# Altium PCB ESP32_PCB.PcbDoc (part 1 of 2)
Units mm, origin at the board's own origin, x right, y up, seen from the top; angles counter-clockwise.
Board outline 63.5 x 20.32 mm, 4 copper layers (Top Layer, Layer 1, Layer 2, Bottom Layer), stack 0.603 mm thick; 45 components, 48 nets, 214 pads, 74 vias.
Unrouted connection lines stored in the file: 1.
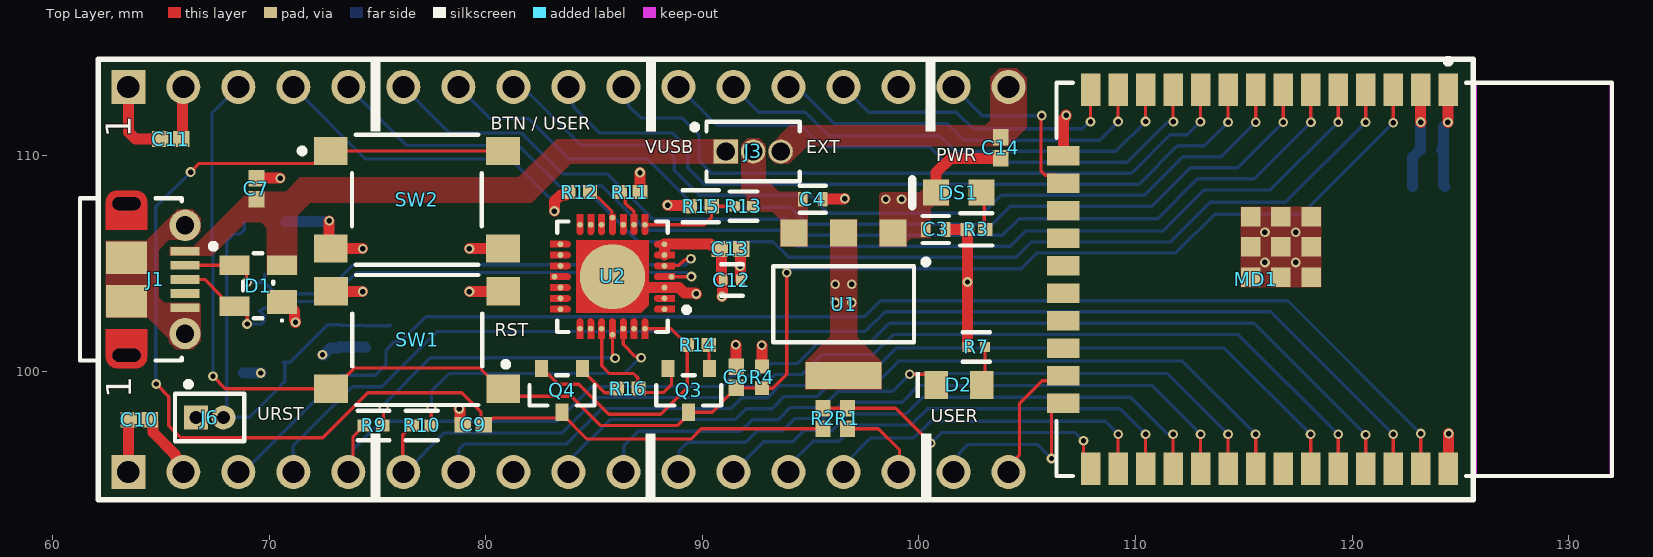
[diagram p0: Top Layer view]
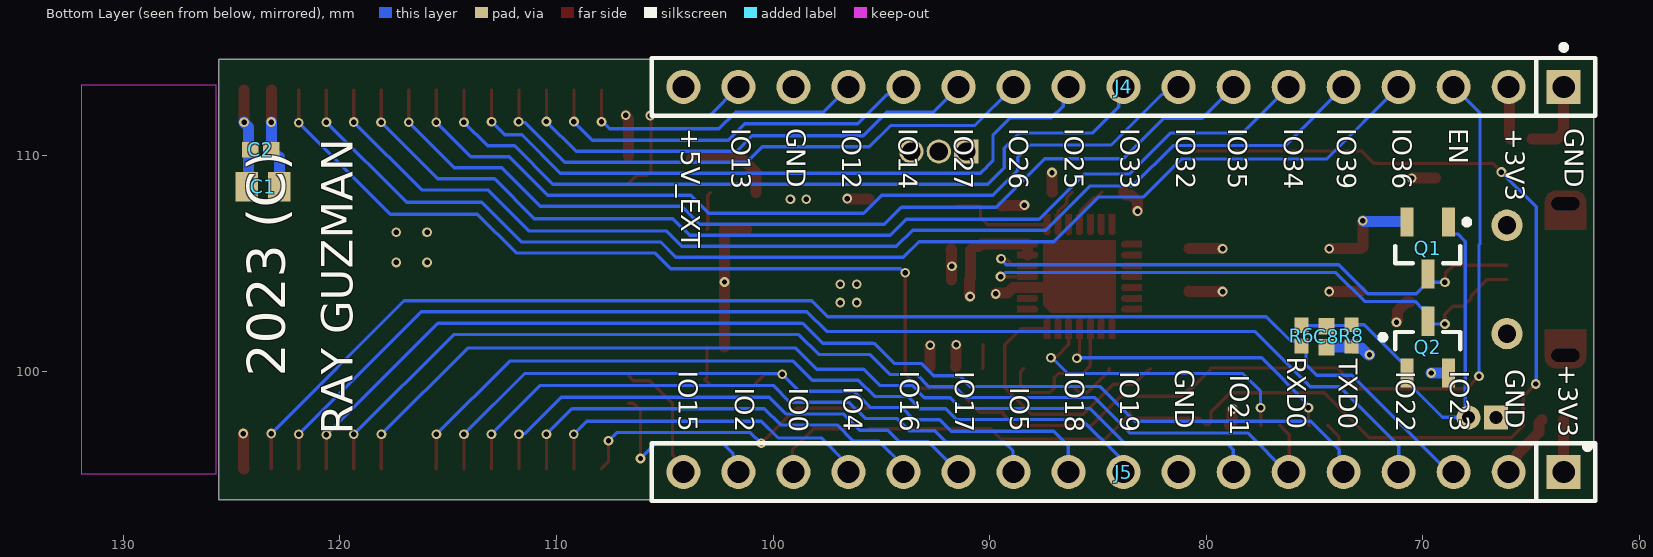
[diagram p1: Bottom Layer view, seen from below]
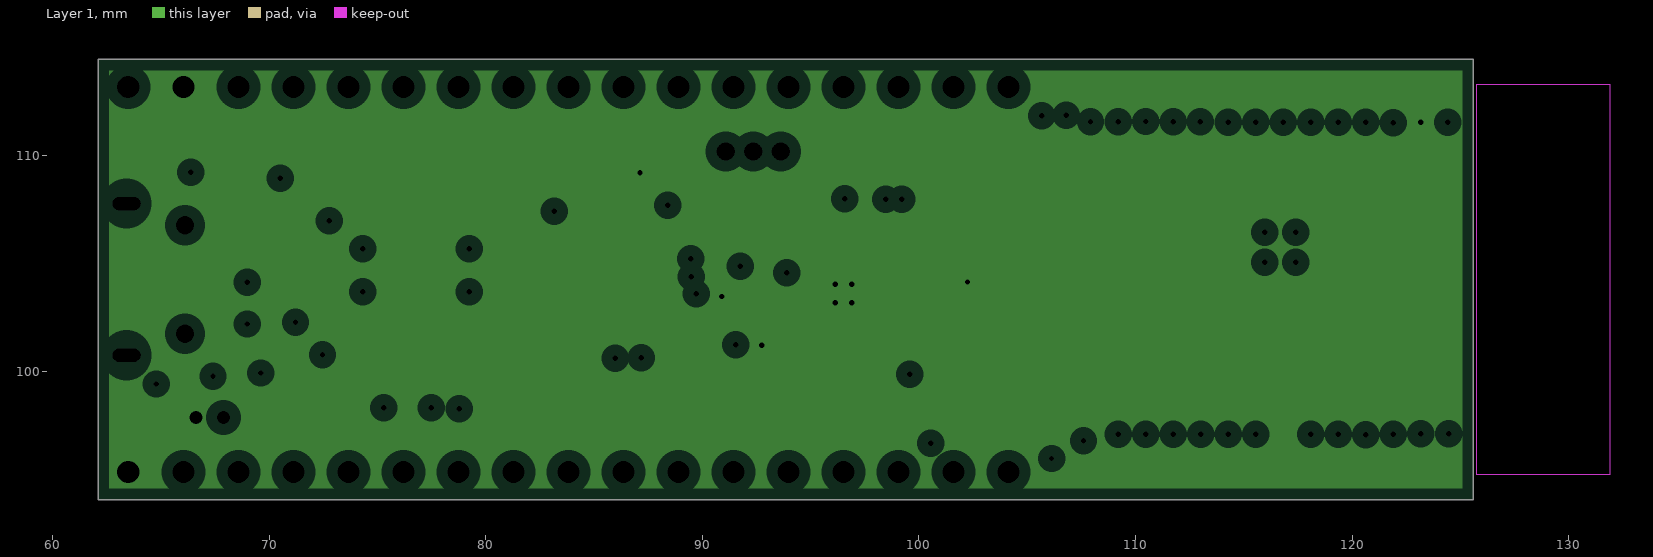
[diagram p2: Layer 1, clearances drawn from the general rule]
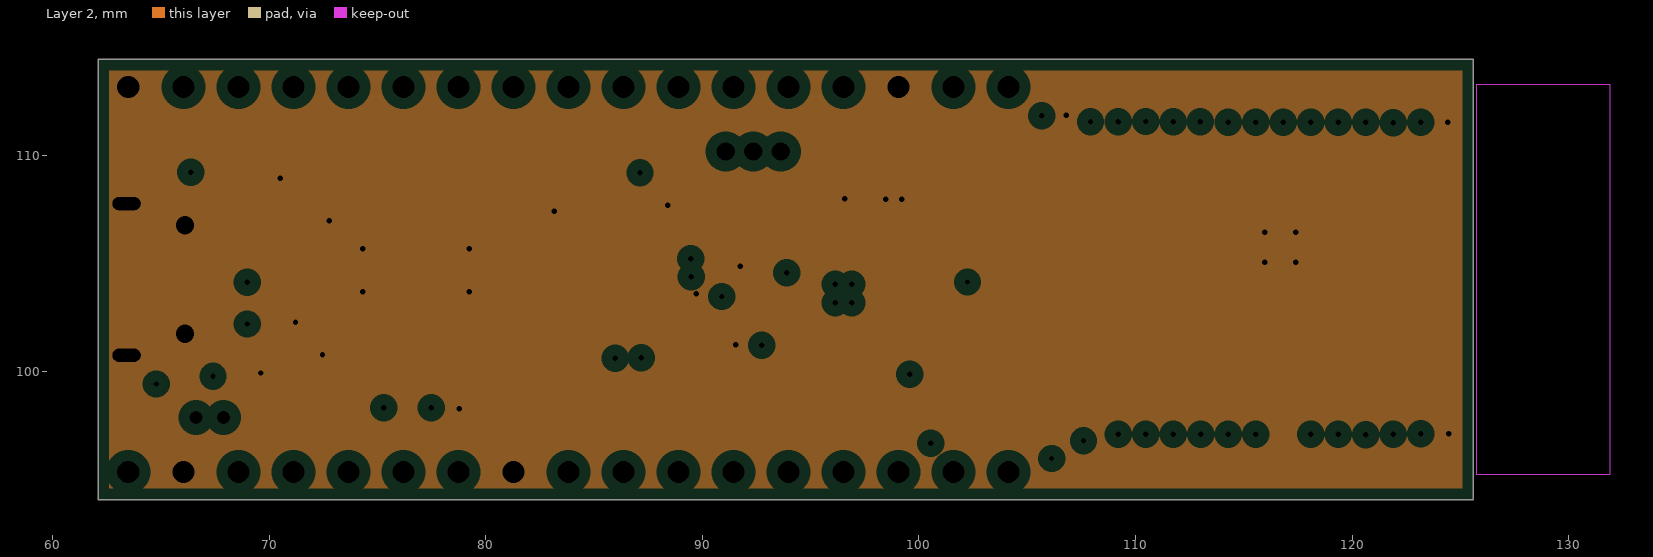
[diagram p3: Layer 2, clearances drawn from the general rule]
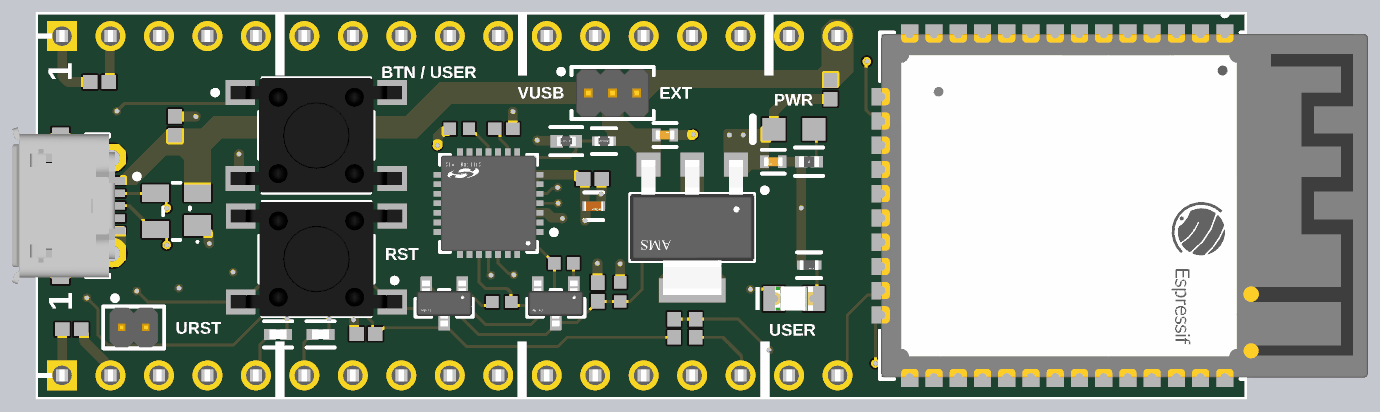
[diagram p4: 3D render of the assembled board from above, using the file's embedded part models]

## Layer stack, top to bottom
Top Solder: solder mask 0.0102, Solder Resist, Dk 3.5
Top Layer: signal copper 0.0356
Dielectric 2: prepreg 0.0711, PP-006, Dk 4.1
Layer 1: plane copper 0.035, net +3V3
Dielectric 1: dielectric 0.32, FR-4, Dk 4.8
Layer 2: plane copper 0.035, net GND
Dielectric 3: prepreg 0.0711, PP-006, Dk 4.1
Bottom Layer: signal copper 0.0356
Bottom Solder: solder mask 0.0102, Solder Resist, Dk 3.5

## Board outline
62.103,94.107 62.103,114.427 125.603,114.427 125.603,94.107

## Design rules (kind name [scope] priority, off if disabled: settings)
Clearance [IsComponent('J3')] p1: gap=0.254 ignorepadtopadclearanceinfootprint=FALSE except(0: Arc-Hole Track-Hole SMDPad-Hole THPad-Hole Via-Hole Fill-Hole Poly-Hole Region-Hole Text-Hole; 0.1: SMDPad-SMDPad; 0.2: Arc-SMDPad Track-SMDPad)
DiffPairsRouting [All] p1: maxlimit=0.203 minlimit=0.203 mostfreqgap=0.203 toplayer_minwidth=0.125 toplayer_maxwidth=0.5 toplayer_prefwidth=0.153 bottomlayer_minwidth=0.125 bottomlayer_maxwidth=0.5 bottomlayer_prefwidth=0.153 maxuncoupledlength=12.7
MinimumSolderMaskSliver [All] p1: minsoldermaskwidth=0.016
PlaneClearance [All] p1: clearance=0.508
PlaneConnect [All] p1: planeconnectstyle=Direct reliefexpansion=0.508 reliefentries=4 reliefconductorwidth=0.254 reliefairgap=0.254
PolygonConnect [All] p1: connectstyle=Direct reliefconductorwidth=0.254 reliefentries=4 polygonreliefangle="90 Angle" airgapwidth=0.254
RoutingVias [All] p1: holewidth=0.45 width=0.25 viastyle="Through Hole" minholewidth=0.45 minwidth=0.2 maxholewidth=0.8 maxwidth=0.45
SilkToSolderMaskClearance [IsPad] p1: minsilkscreentomaskgap=0.1 clearancetoexposedcopper=TRUE
SolderMaskExpansion [All] p1: expansion=0.102 istentingtop=FALSE
Width [All] p1: maxlimit=1 minlimit=0.152 preferedwidth=0.254
25 further rules are at their usual default settings.

## Classes and differential pairs
differential pair class USB_D: USB_D
differential pair USB_D: +USB_D_P -USB_D_N

## Components (designator, comment, footprint, x,y, rotation, side; value= is the part's Value field where it differs from the comment)
C1 "CL21A226MAQNNNE" CAPC2013X140X45LL15T25 123.55,108.55 r0 bottom
C2 "CL05B104KO5NNNC" CAPC1050X55X23ML05T13 123.65,110.25 r0 bottom
C3 "CL05A106MP5NUNC" FP-CL05A106MP5NUNC-MFG 100.775,106.575 r180 top value=10uF
C4 "CL05A106MP5NUNC" FP-CL05A106MP5NUNC-MFG 95.1,107.975 r0 top value=10uF
C6 "CL05B104KO5NNNC" CAPC1050X55X23ML05T13 91.575,99.75 r270 top
C7 "CL05B104KO5NNNC" CAPC1050X55X23ML05T13 69.418,108.458 r90 top
C8 "CL05B104KO5NNNC" CAPC1050X55X23ML05T13 74.45,101.625 r90 bottom
C9 "CL05B104KO5NNNC" CAPC1050X55X23ML05T13 79.423,97.55 r0 top
C10 "CL05B104KO5NNNC" CAPC1050X55X23ML05T13 64.008,97.79 r0 top
C11 "CL05B104KO5NNNC" CAPC1050X55X23ML05T13 65.465,110.75 r180 top
C12 "C1005X5R1A475K050BC" FP-C1005-050-0_15-MFG 91.364,104.242 r0 top
C13 "CL05B104KO5NNNC" CAPC1050X55X23ML05T13 91.3,105.675 r0 top
C14 "CL05B104KO5NNNC" CAPC1050X55X23ML05T13 103.775,110.35 r270 top
D1 "SP0503BAHTG" LFUS-SOT143-4_V 69.5,103.975 r180 top
D2 "150080RS75000" WL-SMCW_0805_150080xx75000 101.85,99.4 r0 top
DS1 "HSMG-C170" AVAG-HSMX-C170_V 101.85,108.275 r180 top
J1 "105017-0001" USB-MICRO-B_V 64.77,104.267 r270 top
J3 "M52-040023V0345" FP-M52-040023V0345-MFG 92.35,110.175 r0 top
J4 "TSW-117-23-T-S" FP-TSW-117-23-T-S-MFG 83.82,113.157 r0 bottom
J5 "TSW-117-23-T-S" FP-TSW-117-23-T-S-MFG 83.82,95.377 r0 bottom
J6 "Comment" FP-M50-3530242-MFG 67.259,97.892 r0 top
MD1 "ESP32-WROOM-32D (8MB)" FP-ESP32-WROOM-32D_8MB-MFG 119.176,104.267 r270 top
Q1 "2N7002" INF-PG-SOT23_M 69.774,105.715 r270 bottom
Q2 "2N7002" INF-PG-SOT23_M 69.774,101.143 r90 bottom
Q3 "SS8050-G" FP-SS8050-G-MFG 89.375,99.15 r270 top
Q4 "SS8050-G" FP-SS8050-G-MFG 83.525,99.15 r270 top
R1 "RK73B1ETTP220J" RESC1005X40X25ML10T10 96.7,97.85 r270 top
R2 "RK73B1ETTP220J" RESC1005X40X25ML10T10 95.575,97.85 r270 top
R3 "PNM0402E5001BST1" FP-PNM0402-IPC_C 102.65,106.575 r180 top
R4 "CRCW040210K0JNTD" RESC1005X40X25ML05T05 92.75,99.75 r90 top
R6 "MCMR04X1001FTL" RESC1005X40X25ML05T10 75.6,101.675 r270 bottom
R7 "ESR01MZPJ561" FP-ESR01-IPC_C 102.65,101.15 r180 top
R8 "CRCW040210K0JNTD" RESC1005X40X25ML05T05 73.3,101.675 r90 bottom
R9 "CR0402-J/-000GLF" FP-CR0402-IPC_B 74.825,97.525 r0 top
R10 "CR0402-J/-000GLF" FP-CR0402-IPC_B 77.05,97.525 r0 top
R11 "MCMR04X1001FTL" RESC1005X40X25ML05T10 86.65,108.3 r0 top
R12 "CRCW040210K0JNTD" RESC1005X40X25ML05T05 84.325,108.3 r0 top
R13 "ERJ-2RKF2212X" FP-ERJ2RK-IPC_C 91.9,107.65 r0 top
R14 "CRCW040210K0JNTD" RESC1005X40X25ML05T05 89.8,101.25 r180 top
R15 "ERJ-2RKF4752X" FP-ERJ2RK-IPC_A 89.925,107.65 r0 top
R16 "CRCW040210K0JNTD" RESC1005X40X25ML05T05 86.55,99.225 r180 top
SW1 "PTS645SH50SMTR92LFS" FP-PTS645SH50SMTR92LFS-MFG 76.835,101.473 r180 top
SW2 "PTS645SH50SMTR92LFS" FP-PTS645SH50SMTR92LFS-MFG 76.825,107.95 r0 top
U1 "AMS1117-3.3" FP-AMS1117-IPC_C 96.525,103.125 r270 top locked
U2 "CP2102N-A02-GQFN28R" FP-CP2102N-A02-GQFN28R-MFG 85.852,104.394 r180 top

## Footprints (in the part's own frame and the unit in brackets; to place one, negate y for a bottom-side part, rotate by r counter-clockwise, add the part's x,y. Pads: shape width x height; smd on the part's side, far side on the other; paste and mask are expansions set on the pad)
AVAG-HSMX-C170_V [mm] "SMD, 2-Leads, Body 2x1.25mm, Height 0.8mm"
  rect 1.2x1.2 smd: 1(-1.05,0) 2(1.05,0)
  silkscreen extent 2.15,-0.63 2.15,0.63, body extent -1,-0.63 1,0.63, height 0.8
CAPC1050X55X23ML05T13 [mm] "Chip Capacitor, 2-Leads, Body 1.05x0.55mm, IPC Low Density"
  rect 0.76x0.72 smd: 1(-0.49,0) 2(0.49,0)
  body extent -0.53,-0.28 0.53,0.27, height 0.55
CAPC2013X140X45LL15T25 [mm] "Chip Capacitor, 2-Leads, Body 2.00x1.25mm, IPC High Density"
  rect 1.05x1.35 smd: 1(-0.75,0) 2(0.75,0)
  body extent -1.08,-0.7 1.07,0.7, height 1.4
FP-AMS1117-IPC_C [mm]
  rect 1.25x1.25 smd paste+0 mask+0: 1(-3.295,2.29) 2(-3.295,0) 3(-3.295,-2.29)
  rect 1.25x3.5 smd paste+0 mask+0: 4(3.295,0)
  silkscreen extent -2.07,-3.25 1.75,3.92, body extent -3.9,-3.35 3.9,3.35, height 0.25
FP-C1005-050-0_15-MFG [mm]
  rect 0.4x0.5 smd paste+0 mask+0: 1(-0.4,0) 2(0.4,0)
  silkscreen extent -0.5,-0.73 0.5,0.73, body extent -0.7,-0.43 0.7,0.43, height 0.25
FP-CL05A106MP5NUNC-MFG [mm]
  rect 0.45x0.675 smd paste+0 mask+0: 1(-0.463,0) 2(0.463,0)
  silkscreen extent -0.6,-0.63 0.6,0.63, body extent -0.79,-0.45 0.79,0.45, height 0.25
FP-CP2102N-A02-GQFN28R-MFG [mm]
  round 0.27 smd paste+0 mask+0: 1(-2.4,1.5) 2(-2.4,1) 3(-2.4,0.5) 4(-2.725,0) 5(-2.4,-0.5) 6(-2.4,-1) 7(-2.4,-1.5) 8(-1.5,-2.4) 9(-1,-2.4) 10(-0.5,-2.4) 11(0,-2.725) 12(0.5,-2.4) 13(1,-2.4) 14(1.5,-2.4) 15(2.4,-1.5) 16(2.4,-1) 17(2.4,-0.5) 18(2.675,0) 19(2.4,0.5) 20(2.4,1) 21(2.4,1.5) 22(1.5,2.4) 23(1,2.4) 24(0.5,2.4) 25(0,2.675) 26(-0.5,2.4) 27(-1,2.4) 28(-1.5,2.4)
  round 3.015 smd paste-1000 mask+0: 29(0,0)
  Top Layer region: -2.875,1.65 -2.075,1.65 -2.018,1.639 -1.969,1.606 -1.936,1.557 -1.925,1.5 -1.925,1.5 -1.936,1.443 -1.969,1.394 -2.018,1.361 -2.075,1.35 -2.075,1.35 -2.875,1.35
  Top Layer region: -2.875,1.15 -2.075,1.15 -2.018,1.139 -1.969,1.106 -1.936,1.057 -1.925,1 -1.925,1 -1.936,0.943 -1.969,0.894 -2.018,0.861 -2.075,0.85 -2.075,0.85 -2.875,0.85
  Top Layer region: -2.875,0.65 -2.075,0.65 -2.018,0.639 -1.969,0.606 -1.936,0.557 -1.925,0.5 -1.925,0.5 -1.936,0.443 -1.969,0.394 -2.018,0.361 -2.075,0.35 -2.075,0.35 -2.875,0.35
  Top Layer region: -2.875,0.15 -2.075,0.15 -2.018,0.139 -1.969,0.106 -1.936,0.057 -1.925,0 -1.925,0 -1.936,-0.057 -1.969,-0.106 -2.018,-0.139 -2.075,-0.15 -2.075,-0.15 -2.875,-0.15
  Top Layer region: -2.875,-0.35 -2.075,-0.35 -2.018,-0.361 -1.969,-0.394 -1.936,-0.443 -1.925,-0.5 -1.925,-0.5 -1.936,-0.557 -1.969,-0.606 -2.018,-0.639 -2.075,-0.65 -2.075,-0.65 -2.875,-0.65
  Top Layer region: -2.875,-0.85 -2.075,-0.85 -2.018,-0.861 -1.969,-0.894 -1.936,-0.943 -1.925,-1 -1.925,-1 -1.936,-1.057 -1.969,-1.106 -2.018,-1.139 -2.075,-1.15 -2.075,-1.15 -2.875,-1.15
  Top Layer region: -2.875,-1.35 -2.075,-1.35 -2.018,-1.361 -1.969,-1.394 -1.936,-1.443 -1.925,-1.5 -1.925,-1.5 -1.936,-1.557 -1.969,-1.606 -2.018,-1.639 -2.075,-1.65 -2.075,-1.65 -2.875,-1.65
  Top Layer region: -1.65,-2.875 -1.65,-2.075 -1.639,-2.018 -1.606,-1.969 -1.557,-1.936 -1.5,-1.925 -1.5,-1.925 -1.443,-1.936 -1.394,-1.969 -1.361,-2.018 -1.35,-2.075 -1.35,-2.075 -1.35,-2.875
  Top Layer region: -1.15,-2.875 -1.15,-2.075 -1.139,-2.018 -1.106,-1.969 -1.057,-1.936 -1,-1.925 -1,-1.925 -0.943,-1.936 -0.894,-1.969 -0.861,-2.018 -0.85,-2.075 -0.85,-2.075 -0.85,-2.875
  Top Layer region: -0.65,-2.875 -0.65,-2.075 -0.639,-2.018 -0.606,-1.969 -0.557,-1.936 -0.5,-1.925 -0.5,-1.925 -0.443,-1.936 -0.394,-1.969 -0.361,-2.018 -0.35,-2.075 -0.35,-2.075 -0.35,-2.875
  Top Layer region: -0.15,-2.875 -0.15,-2.075 -0.139,-2.018 -0.106,-1.969 -0.057,-1.936 0,-1.925 0,-1.925 0.057,-1.936 0.106,-1.969 0.139,-2.018 0.15,-2.075 0.15,-2.075 0.15,-2.875
  Top Layer region: 0.35,-2.875 0.35,-2.075 0.361,-2.018 0.394,-1.969 0.443,-1.936 0.5,-1.925 0.5,-1.925 0.557,-1.936 0.606,-1.969 0.639,-2.018 0.65,-2.075 0.65,-2.075 0.65,-2.875
  Top Layer region: 0.85,-2.875 0.85,-2.075 0.861,-2.018 0.894,-1.969 0.943,-1.936 1,-1.925 1,-1.925 1.057,-1.936 1.106,-1.969 1.139,-2.018 1.15,-2.075 1.15,-2.075 1.15,-2.875
  Top Layer region: 1.35,-2.875 1.35,-2.075 1.361,-2.018 1.394,-1.969 1.443,-1.936 1.5,-1.925 1.5,-1.925 1.557,-1.936 1.606,-1.969 1.639,-2.018 1.65,-2.075 1.65,-2.075 1.65,-2.875
  Top Layer region: 2.875,-1.65 2.075,-1.65 2.018,-1.639 1.969,-1.606 1.936,-1.557 1.925,-1.5 1.925,-1.5 1.936,-1.443 1.969,-1.394 2.018,-1.361 2.075,-1.35 2.075,-1.35 2.875,-1.35
  Top Layer region: 2.875,-1.15 2.075,-1.15 2.018,-1.139 1.969,-1.106 1.936,-1.057 1.925,-1 1.925,-1 1.936,-0.943 1.969,-0.894 2.018,-0.861 2.075,-0.85 2.075,-0.85 2.875,-0.85
  Top Layer region: 2.875,-0.65 2.075,-0.65 2.018,-0.639 1.969,-0.606 1.936,-0.557 1.925,-0.5 1.925,-0.5 1.936,-0.443 1.969,-0.394 2.018,-0.361 2.075,-0.35 2.075,-0.35 2.875,-0.35
  Top Layer region: 2.875,-0.15 2.075,-0.15 2.018,-0.139 1.969,-0.106 1.936,-0.057 1.925,0 1.925,0 1.936,0.057 1.969,0.106 2.018,0.139 2.075,0.15 2.075,0.15 2.875,0.15
  Top Layer region: 2.875,0.35 2.075,0.35 2.018,0.361 1.969,0.394 1.936,0.443 1.925,0.5 1.925,0.5 1.936,0.557 1.969,0.606 2.018,0.639 2.075,0.65 2.075,0.65 2.875,0.65
  Top Layer region: 2.875,0.85 2.075,0.85 2.018,0.861 1.969,0.894 1.936,0.943 1.925,1 1.925,1 1.936,1.057 1.969,1.106 2.018,1.139 2.075,1.15 2.075,1.15 2.875,1.15
  Top Layer region: 2.875,1.35 2.075,1.35 2.018,1.361 1.969,1.394 1.936,1.443 1.925,1.5 1.925,1.5 1.936,1.557 1.969,1.606 2.018,1.639 2.075,1.65 2.075,1.65 2.875,1.65
  Top Layer region: 1.65,2.875 1.65,2.075 1.639,2.018 1.606,1.969 1.557,1.936 1.5,1.925 1.5,1.925 1.443,1.936 1.394,1.969 1.361,2.018 1.35,2.075 1.35,2.075 1.35,2.875
  Top Layer region: 1.15,2.875 1.15,2.075 1.139,2.018 1.106,1.969 1.057,1.936 1,1.925 1,1.925 0.943,1.936 0.894,1.969 0.861,2.018 0.85,2.075 0.85,2.075 0.85,2.875
  Top Layer region: 0.65,2.875 0.65,2.075 0.639,2.018 0.606,1.969 0.557,1.936 0.5,1.925 0.5,1.925 0.443,1.936 0.394,1.969 0.361,2.018 0.35,2.075 0.35,2.075 0.35,2.875
  Top Layer region: 0.15,2.875 0.15,2.075 0.139,2.018 0.106,1.969 0.057,1.936 0,1.925 0,1.925 -0.057,1.936 -0.106,1.969 -0.139,2.018 -0.15,2.075 -0.15,2.075 -0.15,2.875
  Top Layer region: -0.35,2.875 -0.35,2.075 -0.361,2.018 -0.394,1.969 -0.443,1.936 -0.5,1.925 -0.5,1.925 -0.557,1.936 -0.606,1.969 -0.639,2.018 -0.65,2.075 -0.65,2.075 -0.65,2.875
  Top Layer region: -0.85,2.875 -0.85,2.075 -0.861,2.018 -0.894,1.969 -0.943,1.936 -1,1.925 -1,1.925 -1.057,1.936 -1.106,1.969 -1.139,2.018 -1.15,2.075 -1.15,2.075 -1.15,2.875
  Top Layer region: -1.35,2.875 -1.35,2.075 -1.361,2.018 -1.394,1.969 -1.443,1.936 -1.5,1.925 -1.5,1.925 -1.557,1.936 -1.606,1.969 -1.639,2.018 -1.65,2.075 -1.65,2.075 -1.65,2.875
  Top Layer region: -1.325,1.675 1.675,1.675 1.675,-1.675 -1.675,-1.675 -1.675,1.325 -1.325,1.675
  silkscreen extent -3.55,-2.55 2.55,2.55, body extent -2.98,-2.98 2.98,2.98, height 0.25
FP-CR0402-IPC_B [mm]
  rect 0.615x0.572 smd paste+0 mask+0: 1(-0.429,0) 2(0.429,0)
  silkscreen extent -0.74,-0.69 0.74,0.69, body extent -0.89,-0.44 0.89,0.44, height 0.25
FP-ERJ2RK-IPC_A [mm]
  rect 0.668x0.672 smd paste+0 mask+0: 1(-0.502,0) 2(0.502,0)
  silkscreen extent -0.84,-0.74 0.84,0.74, body extent -1.04,-0.54 1.04,0.54, height 0.25
FP-ERJ2RK-IPC_C [mm]
  rect 0.468x0.472 smd paste+0 mask+0: 1(-0.402,0) 2(0.402,0)
  silkscreen extent -0.64,-0.67 0.64,0.68, body extent -0.74,-0.38 0.74,0.38, height 0.25
FP-ESP32-WROOM-32D_8MB-MFG [mm]
  rect 1.5x0.9 smd paste+0 mask+0: 1(-8.75,5.26) 2(-8.75,3.99) 3(-8.75,2.72) 4(-8.75,1.45) 5(-8.75,0.18) 6(-8.75,-1.09) 7(-8.75,-2.36) 8(-8.75,-3.63) 9(-8.75,-4.9) 10(-8.75,-6.17) 11(-8.75,-7.44) 12(-8.75,-8.71) 13(-8.75,-9.98) 14(-8.75,-11.25) 25(8.75,-11.25) 26(8.75,-9.98) 27(8.75,-8.71) 28(8.75,-7.44) 29(8.75,-6.17) 30(8.75,-4.9) 31(8.75,-3.63) 32(8.75,-2.36) 33(8.75,-1.09) 34(8.75,0.18) 35(8.75,1.45) 36(8.75,2.72) 37(8.75,3.99) 38(8.75,5.26)
  rect 0.9x1.5 smd paste+0 mask+0: 15(-5.71,-12.5) 16(-4.44,-12.5) 17(-3.17,-12.5) 18(-1.9,-12.5) 19(-0.63,-12.5) 20(0.64,-12.5) 21(1.91,-12.5) 22(3.18,-12.5) 23(4.45,-12.5) 24(5.72,-12.5)
  rect 0.9x0.9 smd paste+0 mask+0: 39(-2.9,-2.46) 39(-2.9,-1.06) 39(-2.9,-3.86) 39(-1.5,-1.06) 39(-1.5,-2.46) 39(-1.5,-3.86) 39(-0.1,-1.06) 39(-0.1,-2.46) 39(-0.1,-3.86)
  Keep-Out Layer region: -9,6.56 9,6.56 9,12.75 -9,12.75
  Keep-Out Layer region: -9,6.56 9,6.56 9,12.75 -9,12.75
  silkscreen extent -10.2,-12.83 9.08,12.83, body extent -9.6,-13.35 9.6,12.93, height 0.25
FP-ESR01-IPC_C [mm]
  rect 0.466x0.472 smd paste+0 mask+0: 1(-0.403,0) 2(0.403,0)
  silkscreen extent -0.64,-0.67 0.64,0.67, body extent -0.74,-0.38 0.74,0.38, height 0.25
FP-M50-3530242-MFG [mm]
  rect 1.1x1.1 hole 0.6 paste-2539.97 mask+0: 1(-0.635,0)
  round 1.1 hole 0.6 paste-2539.97 mask+0: 2(0.635,0)
  silkscreen extent -1.6,-1.1 1.6,1.66, body extent -1.62,-1.2 1.62,1.2, height 0.25
FP-M52-040023V0345-MFG [mm]
  rect 1.12x1.12 hole 0.85 paste-2539.97 mask+0: 1(-1.27,0)
  round 1.12 hole 0.85 paste-2539.97 mask+0: 2(0,0) 3(1.27,0)
  silkscreen extent -2.82,-1.37 2.15,1.37, body extent -2.25,-1.47 2.25,1.47, height 0.25
FP-PNM0402-IPC_C [mm]
  rect 0.663x0.595 smd paste+0 mask+0: 1(-0.407,0) 2(0.407,0)
  silkscreen extent -0.74,-0.74 0.74,0.74, body extent -0.84,-0.44 0.84,0.44, height 0.25
FP-PTS645SH50SMTR92LFS-MFG [mm]
  rect 1.55x1.3 smd paste+0 mask+0: 1(-3.975,2.25) 2(3.975,2.25) 3(-3.975,-2.25) 4(3.975,-2.25)
  silkscreen extent -4.22,-3 3,3, body extent -4.5,-3 4.5,3, height 4.3
FP-SS8050-G-MFG [mm]
  rect 0.8x0.6 smd paste+0 mask+0: 1(-1.01,0.95) 2(-1.01,-0.95) 3(1.01,0)
  silkscreen extent -0.7,-1.5 0.7,1.5, body extent -1.51,-1.6 1.51,1.6, height 0.25
FP-TSW-117-23-T-S-MFG [mm]
  rect 1.57x1.57 hole 1.02 paste-2539.97 mask+0: 1(-20.32,0)
  round 1.57 hole 1.02 paste-2539.97 mask+0: 2(-17.78,0) 3(-15.24,0) 4(-12.7,0) 5(-10.16,0) 6(-7.62,0) 7(-5.08,0) 8(-2.54,0) 9(0,0) 10(2.54,0) 11(5.08,0) 12(7.62,0) 13(10.16,0) 14(12.7,0) 15(15.24,0) 16(17.78,0) 17(20.32,0)
  silkscreen extent -21.78,-1.95 21.78,1.34, body extent -21.59,-1.27 21.72,1.27, height 8.71
INF-PG-SOT23_M [mm] "SOT23, 3-Leads, Body 2.9x1.3mm, Pitch 0.95mm, IPC Low Density"
  rect 1.35x0.6 smd: 1(-1.2,0.95) 2(-1.2,-0.95) 3(1.2,0)
  silkscreen extent -1.32,-1.5 0.7,1.92, body extent -0.7,-1.5 0.7,1.5, height 1.1
LFUS-SOT143-4_V [mm] "SOT143, 4-Leads, Body 3.04x1.4mm, Pitch 1.90mm"
  rect 1.4x1.1 smd: 1(-1.1,0.75)
  rect 1.4x0.9 smd: 2(-1.1,-0.95) 3(1.1,-0.95) 4(1.1,0.95)
  silkscreen extent -1.15,-1.5 0.7,1.65, body extent -0.7,-1.52 0.7,1.52, height 1.22
RESC1005X40X25ML05T05 [mm] "Chip Resistor, 2-Leads, Body 1.00x0.50mm, IPC Low Density"
  rect 0.65x0.65 smd: 1(-0.5,0) 2(0.5,0)
  body extent -0.53,-0.27 0.53,0.28, height 0.4
RESC1005X40X25ML05T10 [mm] "Chip Resistor, 2-Leads, Body 1.00x0.50mm, IPC Low Density"
  rect 0.7x0.65 smd: 1(-0.475,0) 2(0.475,0)
  body extent -0.53,-0.27 0.53,0.28, height 0.4
RESC1005X40X25ML10T10 [mm] "Chip Resistor, 2-Leads, Body 1.00x0.50mm, IPC Low Density"
  rect 0.75x0.7 smd: 1(-0.475,0) 2(0.475,0)
  body extent -0.55,-0.3 0.55,0.3, height 0.4
USB-MICRO-B_V [mm] "USB, MICRO B, Body 7.491x4.695 mm, Pitch 0.65 mm"
  rect 0.4x1.35 smd: 1(-1.3,1.35) 2(-0.65,1.35) 3(0,1.35) 4(0.65,1.35) 5(1.3,1.35)
  round 1.45 hole 0.85: 6(-2.5,1.35) 7(2.5,1.35)
  rrect50% 0x0 hole 0.6 slot 1.3 at 90 deg: 8(-3.5,-1.35) 11(3.5,-1.35)
  rect 1.5x1.9 smd: 9(-1,-1.35) 10(1,-1.35)
  Top Layer circle w0.5: c-3.6,-1.8 r0.25
  Top Layer circle w0.5: c-3.6,-0.9 r0.25
  Top Layer circle w0.5: c3.6,-1.8 r0.25
  Top Layer circle w0.5: c3.6,-0.9 r0.25
  Top Layer region: -3.6,-1.8 -3.6,-0.9 -4.1,-0.9 -4.1,-1.8
  Top Layer region: 3.6,-0.9 3.6,-1.8 4.1,-1.8 4.1,-0.9
  Top Layer region: 2.3,-0.4 2.3,-2.3 3.6,-2.3 3.6,-0.4
  Top Layer region: -2.3,-2.3 -2.3,-0.4 -3.6,-0.4 -3.6,-2.3
  silkscreen extent -3.75,-3.5 3.75,2.78, body extent -4.1,-3.9 4.1,1.5, height 2.67
WL-SMCW_0805_150080xx75000 [mm] "SMD Mono-color Chip LED, body 2.0x1.25mm"
  rect 1.1x1.3 smd: 1(-1.05,0) 2(1.05,0)
  silkscreen extent -2,-0.6 -1.8,0.6, body extent -1,-0.63 1,0.62, height 0.7

## Part data
C1: library part CMP-2000-06104-1, "Multi-layer Ceramic Capacitor, 22 uF, -55 to 85 degC, 2-Pin SMD (0805), RoHS, Tape and Reel", Capacitance=22µF, Manufacturer="Samsung Electro-Mechanics", Operating Temperature=-55°C~85°C, Package / Case=0805(2012Metric), Package Description="2-Pin Surface Mount Device, Body 2.0 x 1.25 mm", Package Reference=0805, Ratings=-, Standard Package=2,000, Temperature Coefficient=X5R, Tolerance=±20%, Voltage - Rated=25V, Applications=GeneralPurpose, Category=Capacitors, Datasheet URL=http://datasheet.octopart.com/CL21A226MAQNNNE-Samsung-datasheet-48647558.pdf, Datasheet Version=07/2015, Family=CeramicCapacitors, Featured Product=Multi-LayerCeramicCapacitors, Features=-, Height - Seated (Max)=-, Lead Spacing=-, Lead Style=-, Manufacturer URL=http://www.samsungsem.com/global/index.jsp, Mounting Technology=SurfaceMount, Mounting Type=SurfaceMount,MLCC, Online Catalog=CLSeries,HighCapacitance, Other Names=1276-2908-2, Packaging=Tape&Reel(TR), Product Training Modules=HighCapMLCCFamily, RoHS Information=MLCCRoHS2Compliance, Series=CL, Size / Dimension="0.079\"Lx0.049\"W(2.00mmx1.25mm)", Thickness (Max)="0.055\"(1.40mm)"
C2 C6 C7 C8 C9 C10 C11 C13 C14: library part CMP-2000-05439-1, "Chip Capacitor, 100 nF, +/- 10%, 16 V, -55 to 125 degC, 0402 (1005 Metric), RoHS, Tape and Reel", Capacitance=100000pF, Case Size/Dimension=0402, Dielectric=X7R, Manufacturer="Samsung Electro-Mechanics", Rated Voltage=16V, Tolerance (%)=±10%, Datasheet URL=https://datasheet.ciiva.com/29198/458718-da-01-en-vs-kondensator-0402-29198423.pdf, Datasheet Version=Nov-10, Manufacturer URL=http://www.samsungsem.com/global/index.jsp
C3 C4: library part CMP-13271-000002-1, "CAP CER 10UF 10V X5R 0402", Capacitance=10uF, Manufacturer=Samsung, Temperature="-55°C to +85°C", Temperature Characteristic=X5R, Temperature Coefficient=15%, Temperature Range High=+85°C, Temperature Range Low=-55°C, Tolerance=20%, Voltage Rating=10V, Automotive=No, Category=Cap, ComponentLink2Description=Datasheet, ComponentLink2URL=http://www.samsungsem.com/kr/support/product-search/mlcc/__icsFiles/afieldfile/2019/05/10/19-CL05A106MP5NUNC.pdf, Device Class L1="Passive Components", Device Class L2=Capacitors, Device Class L3="Ceramic Capacitors", Digikey Description="CAP CER 10UF 10V X5R 0402", Height=0.7mm, Ipc Land Pattern Name=CAPC10050X50, Lead Free=Yes, Manufacturer Part Number=CL05A106MP5NUNC, Material=Ceramic, Octopart=https://octopart.com/cl05a106mp5nunc-samsung-22457395, Package=CL05A106MP5NUNC, RoHS=TRUE
C12: library part CMP-2000-05997-2, "CAP CER 4.7UF 10V X5R 0402", Capacitance=4.7uF, Case Code (Imperial)=0402, Case Code (Metric)=1005, Dielectric=X5R, Dielectric Material=Ceramic, Max Operating Temperature=85°C, Min Operating Temperature=-55°C, Package Quantity=10000, Tolerance=10%, Voltage Rating=10V, Case/Package=0402, Lead Free="Lead Free", Length=0.039inch, Mount="Surface Mount", Packaging="Cut Tape", REACH SVHC="No SVHC", RoHS Compliant=Yes, Series=C, Thickness=0.022inch, Voltage Rating (DC)=10V, Width=0.02inch
D1: library part CMP-2000-05191-1, "TVS Diode Array, 30 pF, 30 KV, -40 to 85 degC, 4-Pin SOT143, RoHS, Tape and Reel", Capacitance Value=30pF, Clamping Voltage=8V, Leakage Current=0.1uA, Manufacturer=Littelfuse, Operating Temp Range=-40Cto85C, Operating Temperature Classification=Industrial, Operating Temperature Max Deg. C=85C, Operating Temperature Min Deg. C=-40C, Package / Case=SOT-143, Reverse Stand-off Voltage=5.5(Min)V, Working Voltage=5.5V, Working Voltage (Max)=5.5V(Min), Clamping Voltage (Max)=8V, Configuration=Triple, Datasheet URL=https://datasheet.ciiva.com/15143/getdatasheetpartid-116020-15143550.pdf, Datasheet Version=Dec-13, Direction Type=Uni-Directional, Leakage Current (Max)=0.1uA, Manufacturer URL=http://www.littelfuse.com/, Mounting=SurfaceMount, Mounting Style=SurfaceMount, Number of Elements=3, Package Type=SOT-143, Packaging=TapeandReel, Pin Count=3+Tab, Polarity=Uni-Directional, Product Depth (mm)=1.4mm, Product Height (mm)=1.05mm, Product Length (mm)=3.04mm, Rad Hardened=No, Suppressor Type=TVS
D2: library part CMP-1426-00011-2, Case Code (Imperial)=0805, Case Code (Metric)=2012, Color=Red, Forward Current=100mA, Forward Voltage=2V, Max Operating Temperature=85°C, Max Reverse Voltage (DC)=5V, Min Operating Temperature=-40°C, Test Current=20mA, Case/Package=0805, Dominant Wavelength=625nm, Height=700µm, Length=2mm, Lens Style="Clear, Rectangular", Luminous Intensity=150mcd, Mount="Surface Mount", NexarPartId=29717781, Packaging="Tape and Reel", Peak Wavelength=630nm, REACH SVHC=Unknown, RoHS=Compliant, Viewing Angle=140°, Wavelength=625nm, Width=1.25mm
DS1: library part CMP-2000-05062-1, "Chip LED, Green, 2.2 V, -40 to 85 degC, 2-Pin SMD, Pb-Free, Tape and Reel", Forward Current If=20mA, Forward Voltage=2.2V, Forward Voltage VF Max=2.6V, LED Colour=Green, Manufacturer=Avago, Operating Temperature Max=85degC, Operating Temperature Min=-30degC, Operating Temperature Range=-30degCto+85degC, Opto Case Style=SMD, Package Description="2-Pin Surface Mount Device, Body 2 x 1.25 mm, Height 0.8 mm", Package Reference=HSMX-C170, Storage Temperature Min=-40degC, Bulb Size=1.25mmx1.4mm, Datasheet URL=https://datasheet.ciiva.com/29280/180495-da-01-en-chip-led-hsmg-c170-gelb-gruen-29280971.pdf, Datasheet Version=Oct-08, Dominant Wavelength=572nm, Dominant Wavelength Typ=572nm, External Depth=0.8mm, External Length / Height=2mm, External Width=1.25mm, Forward Current If Max=20mA, LED Mounting=SMD, LED Type=Standard, Lens Shape=Rectangular, Light Area Height=1mm, Luminous Intensity=15mcd, Luminous Intensity Min=4mcd, Luminous Intensity Typ=15mcd, Manufacturer URL=http://www.avagotech.com/, Mounting Type=SMD, MSL=MSL2A-4weeks, No. of Pins=2, Opto Mounting Orientation=Top, Packaging=CutTape, Peak Forward Current=20mA, Peak Wavelength=570nm, PIV Max=5V, Storage Temperature Max=85degC, SVHC=NoSVHC(16-Jun-2014), Viewing Angle=170deg, Voltage Vf Typ=2.2V, Wavelength Typ=570nm
J1: library part CMP-2000-05827-1, "Micro-USB B Receptacle, Right Angle, Bottom Mount, Surface Mount, with Solder Tabs, -30 to 85 degC, 5-Pin USB, RoHS, Tape and Reel", Manufacturer=Molex, Package Description="5-Leads USB, Micro B, Body 7.5 x 5 mm, Pitch 0.65 mm", Package Reference=MICRO-B, Package Version="Rev. F, 12/2012", Standard Package=1, Voltage - Max=30V, 3D Model=105017-0001.stp, Catalog Drawings=1050170001, Category=Connectors,Interconnects, Circuits=5, Connector Type=USB-microB, Datasheet URL=http://www.molex.com/elqNow/elqRedir.htm?ref=http://www.molex.com/webdocs/datasheets/pdf/en-us/1050170001_IO_CONNECTORS.pdf, Datasheet Version=03/2016, Family=USB,DVI,HDMIConnectors, Featured Product=Micro-USBConnectorsUSBConnectors, Features=Shielded,SolderRetention, Gender=Receptacle, Ingress Protection=-, Manufacturer URL=http://www.molex.com/, Mating Products=WM17145-ND-CABLEMICROUSBBTOSTDA1.0MWM17147-ND-CABLEMICROUSBBTOSTDA2.0MWM17146-ND-CABLEMICROUSBBTOSTDA1.5M, Mounting Technology=SurfaceMount, Mounting Type=BoardCutout,SurfaceMount,RightAngle, Number of Contacts=5, Online Catalog=Molex-MicroUSB, Other Names=WM1399DKR, Package URL=http://www.molex.com/pdm_docs/sd/1050170001_sd.pdf, Packaging=Digi-Reel®, PCN Assembly/Origin=ResinSupplier21/Oct/2015, RoHS Information=1050170001CertofCompliance, Series=-, Specifications=-
J3: library part CMP-15831-000093-1, "CONN HEADER VERT 3POS 1.27MM", Case/Package=SIL, RoHS Compliant=No
J4 J5: library part CMP-02766-001472-1, "CONN HEADER VERT 17POS 2.54MM", Color=Black, Package Quantity=1, Connector Type="Male Pin", Contact Material=Bronze, Contact Mating Length=0.23inch, Contact Plating=Tin, Contact Type="Male Pin", Gender=Male, Height=2.54mm, Housing Color=Black, Housing Material=Plastic, Lead Free="Lead Free", Length=43.2mm, Mount="Through Hole", Number of Contacts=17, Number of Positions=17, Number of Rows=1, Packaging=Bulk, Pitch=0.1inch, REACH SVHC="No SVHC", RoHS Compliant=Yes, Series=TSW, Termination=Solder, Width=2.54mm
J6: library part CMP-15831-000040-1, "CONN HEADER VERT 2POS 1.27MM"
MD1: library part CMP-194065-000011-1, "RX TXRX MOD WIFI TRACE ANT SMD", Case/Package=SMD/SMT, Frequency=2.5GHz, Max Operating Temperature=85°C, Min Operating Temperature=-40°C, Data Rate=150Mbps, Interface=I2C, Memory Size=536KB, Mount="Surface Mount", Packaging="Tape and Reel", Sensitivity=-98dBm
Q1 Q2: library part CMP-1149-00026-1, "N-Channel OptiMOS Small-Signal-Transistor, 60 V VDS, 0.3 A ID, -55 to 150 degC, PG-SOT23, Reel, Green", Manufacturer=Infineon, ComponentLink1Description="Manufacturer URL", ComponentLink1URL=http://www.infineon.com/, ComponentLink2Description=Datasheet, ComponentLink2URL=http://www.infineon.com/dgdl/2N7002_Rev2.4.pdf?folderId=db3a3043156fd573011622e10b5c1f67&fileId=db3a304319bc939a0119c2a9461e79e6, ComponentLink3Description="Package Specification", ComponentLink3URL=http://www.infineon.com/dgdl/SOT23-Package_Overview.pdf?folderId=db3a30431936bc4b0119532290053c66&fileId=db3a30431936bc4b0119533468123c85, DatasheetVersion="Rev. 2.4", Green=TRUE, Halogen-free=TRUE, ID (max)="0.3Â A", IDpuls (max)="1.2Â A", Mounting Technology="Surface Mount", PackageDescription="3-Pin Small Outline Transistor Package, 2.9 x 1.3 mm Body, 0.95 mm Pitch", PackageReference=PG-SOT23, PackageVersion=Apr-08, Packing=Reel, PartNumber=2N7002, Ptot (max)="0.5Â W", QG="0.4Â nC", RDS (on) (max)="3,000 mOhm", RDS (on) (max) (@4.5V)="4,000 mOhm", RthJA (max)="250 K/W", VDS (max)="60 V", VGS(th) (max)="2.5Â V", VGS(th) (min)="1.5Â V"
Q3 Q4: library part CMP-20235-000001-1, "NPN TRANSISTOR 1.5A 40V SOT-23 R", Case/Package=TO-236-3, Collector Emitter Breakdown Voltage=25V, Collector Emitter Voltage (VCEO)=400mV, Max Collector Current=1.5A, Max Power Dissipation=300mW, Transition Frequency=100MHz, Max Breakdown Voltage=25V, Mount="Surface Mount", Packaging="Tape and Reel", RoHS Compliant=Yes
R1 R2: library part CMP-2002-03643-1, Manufacturer="KOA Speer", Part Number=RK73B1ETTP220J
R3: library part CMP-02407-012302-1, "RES SMD 5K OHM 0.1% 1/20W 0402", Case Code (Imperial)=0402, Case Code (Metric)=1005, Max Operating Temperature=155°C, Max Power Dissipation=50mW, Min Operating Temperature=-55°C, Package Quantity=1000, Resistance=5kR, Resistor Type="Thin Film", Temperature Coefficient=25ppm/°C, Tolerance=0.1%, Case/Package=0402, Features="Moisture Resistant", Height=0.033inch, Length=0.042inch, Number of Terminations=2, Packaging="Tape and Reel", RoHS Compliant=Yes, Width=0.022inch
R4 R8 R12 R14 R16: library part CMP-2002-00391-1, Manufacturer="Vishay Dale", Part Number=CRCW040210K0JNTD
R6 R11: library part CMP-2002-06478-1, Manufacturer=Multicomp, Part Number=MCMR04X1001FTL
R7: library part CMP-08839-007364-1, "560Ω ±5% 0.2W 0402 Anti-Surge Chip Resistor AEC-Q200", Case Code (Imperial)=0402, Case Code (Metric)=1005, Max Operating Temperature=155°C, Max Power Dissipation=200mW, Min Operating Temperature=-55°C, Package Quantity=1, Resistance=560R, Resistor Type="Thick Film", Temperature Coefficient=200ppm/°C, Tolerance=5%, Case/Package=0402, Features="Automotive AEC-Q200", Height=0.016inch, Lead Free="Lead Free", Length=0.039inch, Number of Terminations=2, Packaging="Cut Tape", RoHS Compliant=Yes, Series=ESR, Width=0.02inch
R9 R10: library part CMP-2002-05495-2, "Thick Film Chip Resistors 0402 0Ω 0.0625W 5%", Case Code (Imperial)=0402, Case Code (Metric)=1005, Max Operating Temperature=125°C, Max Power Dissipation=63mW, Min Operating Temperature=-55°C, Package Quantity=10000, Power Rating=62.5mW, Resistance=0mR, Temperature Coefficient=500ppm/°C, Tolerance=5%, Voltage Rating=50V, Case/Package=0402, Composition="Thick Film", Contact Plating=Tin, Depth=0.5mm, Height=0.35mm, Length=1mm, Mount="Surface Mount", Number of Pins=2, Packaging="Tape and Reel", Radiation Hardening=No, REACH SVHC="No SVHC", Termination=SMD/SMT, Thickness=356um, Voltage Rating (DC)=50V, Width=0.5mm
R13: library part CMP-1011-00660-3, "RES SMD 22.1K OHM 1% 1/10W 0402", Case Code (Imperial)=0402, Case Code (Metric)=1005, Max Operating Temperature=155°C, Max Power Dissipation=100mW, Min Operating Temperature=-55°C, Package Quantity=1, Resistance=22.1kR, Resistance Tolerance=1%, Resistor Type="Thick Film", Temperature Coefficient=100ppm/°C, Voltage Rating=50V, Case/Package=0402, Construction=Rectangular, Contact Plating=Tin, Depth=0.5mm, Features="Automotive AEC-Q200", Height=0.35mm, Lead Free="Lead Free", Length=1mm, Military Standard=Not, Mount="Surface Mount", Number of Terminations=2, Packaging="Tape and Reel", Power Rating=100mW, Radiation Hardening=No, REACH SVHC="No SVHC", RoHS Compliant=Yes, Series=ERJ, Size Code=0402, Technology="THICK FILM", Termination=SMD/SMT, Tolerance=1%, Voltage Rating (DC)=50V, Width=0.02inch
R15: library part CMP-2002-00957-2, "RES SMD 47.5K OHM 1% 1/10W 0402", Case Code (Imperial)=0402, Case Code (Metric)=1005, Max Operating Temperature=155°C, Max Power Dissipation=100mW, Min Operating Temperature=-55°C, Package Quantity=1, Resistance=47.5kR, Resistance Tolerance=1%, Resistor Type="Thick Film", Temperature Coefficient=100ppm/°C, Voltage Rating=50V, Case/Package=0402, Construction=Rectangular, Contact Plating=Tin, Depth=0.5mm, Features="Automotive AEC-Q200", Height=0.35mm, Lead Free="Lead Free", Length=1mm, Military Standard=Not, Mount="Surface Mount", Number of Terminations=2, Packaging="Tape and Reel", Power Rating=100mW, REACH SVHC="No SVHC", RoHS Compliant=Yes, Series=ERJ, Size Code=0402, Technology="THICK FILM", Termination=SMD/SMT, Tolerance=1%, Voltage Rating (DC)=50V, Width=0.02inch
SW1 SW2: library part CMP-10040-000028-1, "SWITCH TACTILE SPST-NO 0.05A 12V", Case/Package=SMD/SMT, Color=Black, Current Rating=50mA, Max Operating Temperature=60°C, Max Voltage Rating (DC)=12V, Min Operating Temperature=-20°C, Operating Force=200gf, Package Quantity=1000, Actuator Material=Nylon, Actuator Type=Standard, Contact Material=Bronze, Contact Plating=Silver, Depth=9mm, Illumination Type=Non-Illuminated, Lead Free="Lead Free", Length=6mm, Max Current Rating=50mA, Mechanical Life=100000Cycles, Mount="Surface Mount", Orientation=Straight, Packaging="Tape and Reel", REACH SVHC="No SVHC", Switch Function=Off-Mom, Termination="Gull Wing", Throw Configuration=SPST, Voltage Rating (DC)=12V
U1: library part CMP-209535-000001-1, "LDO Voltage Regulators 1A, 3.3V", Dropout Voltage=1.1V, Manufacturer="Advanced Monolithic Systems", Max Junction Temp=+125°C, Max Power Dissipation=1.2W, Max Supply Voltage=15V, Nominal Supply Current=5mA, Output Current=1A, Output Voltage=3.3V, Package=AMS1117, Temperature="-40°C to +125°C", Temperature Range Low=-40°C, Automotive=No, Category=IC, ComponentLink2Description=Datasheet, ComponentLink2URL=http://www.advanced-monolithic.com/pdf/ds1117.pdf, Device Class L1="Integrated Circuits (ICs)", Device Class L2="Power Management ICs", Device Class L3="Voltage Regulators - Linear", Height=1.8mm, Ipc Land Pattern Name=SOT229P700X180-4, Lead Free=Yes, Manufacturer Part Number=AMS1117-3.3, Number Of Outputs=1, Octopart=https://octopart.com/ams1117-3.3-advanced+monolithic+systems-25899300, Output Type=Fixed, RoHS=TRUE, Standoff Height=0.64mm, Temperature Range High=+125°C
U2: library part CMP-08093-000007-1, "IC USB TO UART BRIDGE QFN28"

## Via types
v1: diameter 0.45, hole 0.25, Top Layer to Bottom Layer, tented top, 34 vias
v2: diameter 0.45, hole 0.25, Top Layer to Bottom Layer, 31 vias
v3: diameter 0.45, hole 0.25, Top Layer to Bottom Layer, tented both sides, 9 vias

## Nets (pads, with @x,y where several pads share a name; then routed paths per layer and width w, separated by ;. In a path a pad name is that pad's centre, name@x,y a point inside that pad or via, vN(x,y) a via of type N, cw(c..) or ccw(c..) an arc to the next point about the centre after c; other vN are vias at no path point)
+3V3: C1.1 C2.1 C3.1 C10.1 C11.1 C12.1 C13.1 J4.2 J5.1 J6.1 MD1.2 R3.2 R4.2 R7.2 R11.2 U1.2 U1.4 U2.6 U2.7 | length 23.1
  Top Layer w0.508: J5.1 63.518,95.395 C10.1 ; C11.1 65.998,110.792 65.998,113.115 J4.2 ; R11.2@87.113,108.313 R11.2 v1(87.125,109.2) ; U2.6 U2.7 90.386,105.894 90.499,105.781 90.704,105.781 C13.1 ; C13.1@90.891,105.594 90.891,104.315 90.935,104.27 90.935,103.508 v3(90.907,103.48) ; R4.2 v1(92.75,101.225) ; C3.1 R3.2 v1(102.243,104.15) 102.243,101.21 102.247,101.206 R7.2 ; MD1.2 v2(123.166,111.534) v2@123.175,111.525
  Bottom Layer w0.508: C1.1 122.8,109.91 123.14,110.25 C2.1 123.166,110.256 v2(123.166,111.534)
  other v3: 96.138,103.2 96.9,103.2 96.138,104.05 96.9,104.05
+5V_EXT: C14.1 J3.3 J4.17
+5V_VBUS: C7.1 D1.2 J1.1 J3.1
DTR: Q4.2 R14.2 U2.28 | length 12.3
  Top Layer w0.152: Q4.2 82.675,100.06 82.725,100.06 83.352,99.433 84.292,99.433 85.675,98.05 88.075,98.05 89.3,99.275 R14.2 88.556,101.994 U2.28
EN: C6.2 J4.3 MD1.3 Q3.3 R4.1 SW1.1 SW1.2 | length 80.3
  Top Layer w0.152: v1(67.412,99.797) 67.985,99.223 SW1.2 72.985,99.223 73.94,100.178 79.807,100.178 79.807,100.101 80.685,99.223 SW1.1 81.158,98.875 83.95,98.875 83.958,98.867 83.96,98.867 84.152,98.675 84.152,98.673 85.3,97.525 88.86,97.525 89.375,98.04 Q3.3 90.456,98.14 91.112,98.796 ; 91.112,98.797 91.322,99.007 91.342,99.007 91.575,99.24 C6.2 91.58,99.255 92.745,99.255 R4.1 93.25,99.25 93.9,99.9 v1(93.9,104.575) ; MD1.3 v2(121.896,111.504) v2@121.9,111.5
  Bottom Layer w0.152: v1(67.412,99.797) 67.412,105.868 67.361,105.919 67.361,111.938 J4.3 ; v1(93.9,104.575) 93.953,104.575 94.134,104.756 104.731,104.756 105.467,105.492 111.867,105.492 113.65,107.275 117.667,107.275 v2(121.896,111.504)
GND: C1.2 C2.2 C3.2 C4.2 C6.1 C7.2 C8.1 C9.1 C10.2 C11.2 C12.2 C13.2 C14.2 D1.1 DS1.2 J1.5 J1.6 J1.7 J1.8 J1.9 J1.10 J1.11 J4.1 J4.15 J5.2 J5.8 MD1.1 MD1.15 MD1.38 MD1.39 Q1.2 Q2.2 R8.1 R12.1 R15.1 SW1.3 SW1.4 SW2.3 SW2.4 U1.1 U2.3 U2.29 | length 44.7
  Top Layer w0.508: J4.1 63.518,113.139 63.518,111.065 63.833,110.75 C11.2 ; C10.2 64.651,97.637 64.651,97.198 65.685,96.163 65.685,96.088 66.04,95.733 J5.2 ; C7.2 69.422,108.944 70.507,108.944 v1(70.51,108.941) ; D1.1 70.75,103.225 71.173,102.802 71.173,102.387 71.222,102.339 v1(71.222,102.286) ; v1(72.775,106.975) 72.775,105.775 SW2.3 72.861,105.689 v1(74.32,105.689) ; SW1.4 72.875,103.708 v1(74.32,103.708) ; v1(78.778,98.292) 78.816,98.254 78.816,97.667 C9.1 ; v1(79.248,103.708) 80.795,103.708 SW1.3 ; v1(79.248,105.689) 80.789,105.689 SW2.4 ; v2(83.175,107.425) 83.185,107.435 83.185,107.885 83.475,108.175 83.7,108.175 R12.1 ; U2.29 86.352,103.894 U2.3 88.916,103.894 89.172,103.638 89.687,103.638 v3(89.725,103.6) ; v1(88.4,107.7) 88.425,107.675 89.398,107.675 R15.1 ; v1(91.55,101.25) 91.563,101.237 91.563,100.252 C6.1 ; C12.2 91.754,104.251 91.754,104.867 v3(91.745,104.877) 91.767,104.899 91.767,105.652 C13.2 ; C4.2 96.536,107.975 96.561,108 v2(96.575,108) ; DS1.2 100.8,109.2 101.46,109.86 C14.2 ; MD1.15 106.676,111.673 106.8,111.797 v1(106.8,111.85) ; v1(124.425,111.525) 124.425,113.006 MD1.1 ; MD1.38 124.46,95.541 v1(124.46,97.15)
  Bottom Layer w0.508: J1.7@66.105,101.752 J1.7 ; Q2.2 68.83,99.949 v1(69.621,99.949) ; Q1.2@70.749,106.915 70.751,106.915 70.77,106.934 72.734,106.934 v1(72.775,106.975) ; v1(72.466,100.787) 72.519,100.787 72.836,101.104 73.229,101.104 R8.1 73.32,101.155 74.43,101.155 C8.1 ; C2.2 124.22,110.17 124.22,108.63 C1.2 ; C2.2@124.215,110.225 124.215,111.301 124.425,111.511 v1(124.425,111.525)
  other v1: 115.976,105.054 117.399,105.054 115.976,106.451 117.399,106.451 98.475,107.975 99.2,107.975
IO0: MD1.25 R1.1 R2.1 | length 14.5
  Top Layer w0.152: R2.1 98.925,98.325 v1(100.55,96.7) ; v2(107.6,96.825) 107.6,96.289 107.603,96.286 107.603,95.84 MD1.25
  Bottom Layer w0.152: v1(100.55,96.7) 101.05,97.2 107.225,97.2 v2(107.6,96.825)
IO0_BTN: C9.2 Q4.3 R2.2 SW2.1 SW2.2 | length 60.5
  Top Layer w0.152: v1(64.795,99.441) 65.375,98.862 65.375,97.502 65.916,96.961 72.485,96.961 74.561,99.037 78.89,99.037 79.785,98.142 79.785,97.678 C9.2 ; v1(66.375,109.225) 66.775,109.625 72.062,109.625 72.063,109.626 72.276,109.626 SW2.1 SW2.2 ; C9.2@80.035,97.55 80.36,97.875 83.352,97.875 83.525,98.048 Q4.3 ; Q4.3@83.525,98.04 84.664,96.901 89.484,96.901 89.958,97.375 R2.2
  Bottom Layer w0.152: v1@64.77,99.416 64.77,107.62 v1(66.375,109.225)
IO0_CON: J5.15 R1.2 | length 3.8
  Top Layer w0.152: R1.2 98.125,97.375 99.106,96.394 99.106,95.423 J5.15
IO2: J5.16 MD1.24 | length 8.6
  Top Layer w0.152: v2(106.125,96) 106.125,98.224 106.448,98.547 MD1.24
  Bottom Layer w0.152: J5.16 101.852,95.629 101.852,96.227 102.275,96.65 105.475,96.65 v2(106.125,96)
IO4: J5.14 MD1.26 | length 15.7
  Top Layer w0.152: MD1.26 109.196,97.121 v2(109.2,97.125)
  Bottom Layer w0.152: J5.14 96.52,95.695 97.775,96.95 99.775,96.95 100.55,97.725 108.6,97.725 v2(109.2,97.125)
IO5: J5.11 MD1.29 | length 28.9
  Top Layer w0.152: v2@113,97.075 v2@113.006,97.069 ; MD1.29 v2@113.006,97.069 ; v2(113.006,97.121) v2@113.006,97.069
  Bottom Layer w0.152: J5.11 88.925,95.402 88.925,96.35 89.325,96.75 92,96.75 92.533,97.283 93.725,97.283 94.292,97.85 95.75,97.85 96.5,98.6 99.225,98.6 100,99.375 110.752,99.375 v2(113.006,97.121)
IO12: J4.14 MD1.14 | length 13.8
  Top Layer w0.152: v2(107.925,111.55) 107.926,111.551 MD1.14
  Bottom Layer w0.152: J4.14 97.686,111.991 101.734,111.991 102.5,111.225 107.547,111.225 107.872,111.55 v2(107.925,111.55)
IO13: J4.16 MD1.16 | length 8.5
  Top Layer w0.152: v2(105.675,111.831) 105.637,111.793 105.637,109.288 105.844,109.081 106.302,109.081 MD1.16
  Bottom Layer w0.152: J4.16 102.932,111.825 105.669,111.825 v2(105.675,111.831)
IO14: J4.13 MD1.13 | length 18.1
  Top Layer w0.152: MD1.13 v2(109.196,111.554) v2@109.2,111.55
  Bottom Layer w0.152: J4.13 94.336,113.157 94.7,112.793 94.757,112.793 96.092,111.458 101.317,111.458 102.075,110.7 108.342,110.7 v2(109.196,111.554)
IO15: J5.17 MD1.23 | length 5.9
  Top Layer w0.152: J5.17 104.14,95.674 104.65,96.184 104.65,98.55 105.694,99.594 106.453,99.594 MD1.23
IO16: J5.13 MD1.27 | length 20
  Top Layer w0.152: MD1.27 v2@110.466,97.066 ; v2(110.466,97.121) v2@110.466,97.066 ; v2@110.475,97.075 v2@110.466,97.066
  Bottom Layer w0.152: J5.13 93.98,95.655 95.125,96.8 96.3,96.8 97.05,97.55 99.65,97.55 100.4,98.3 109.287,98.3 v2(110.466,97.121)
IO17: J5.12 MD1.28 | length 24
  Top Layer w0.152: v2@111.725,97.075 v2@111.736,97.064 ; MD1.28 v2@111.736,97.064 ; v2(111.736,97.121) v2@111.736,97.064
  Bottom Layer w0.152: J5.12 92.838,96.775 94.175,96.775 94.708,97.308 96.008,97.308 96.758,98.058 99.408,98.058 100.175,98.825 109.775,98.825 111.441,97.159 111.698,97.159 v2(111.736,97.121)
IO18: D2.1 J5.10 MD1.30 | length 34.7
  Top Layer w0.152: v1(99.575,99.894) 100.377,99.894 100.8,99.471 D2.1 ; v2@114.275,97.075 v2@114.276,97.074 ; MD1.30 v2@114.276,97.074 ; v2(114.276,97.121) v2@114.276,97.074
  Bottom Layer w0.152: J5.10 86.375,95.392 86.375,96.6 87.033,97.258 91.775,97.258 92.308,97.791 93.5,97.791 94.067,98.358 95.525,98.358 96.276,99.109 98.79,99.109 v1(99.575,99.894) ; v1@99.575,99.9 99.6,99.925 111.472,99.925 v2(114.276,97.121)
IO19: J5.9 MD1.31 | length 37.1
  Top Layer w0.152: MD1.31 v2@115.546,97.096 ; v2(115.546,97.121) v2@115.546,97.096 ; v2@115.55,97.1 v2@115.546,97.096
  Bottom Layer w0.152: J5.9 84.072,95.629 84.072,96.122 85.75,97.8 91.525,97.8 92.024,98.299 93.225,98.299 93.792,98.866 95.315,98.866 96.066,99.617 98.192,99.617 99.075,100.5 112.167,100.5 v2(115.546,97.121)
IO21: J5.7 MD1.33 | length 45.6
  Top Layer w0.152: v2@118.075,97.075 v2@118.086,97.064 ; MD1.33 v2@118.086,97.064 ; v2(118.086,97.121) v2@118.086,97.064
  Bottom Layer w0.152: J5.7 78.75,95.387 78.75,96.4 79.02,96.67 83.72,96.67 85.358,98.308 91.315,98.308 91.814,98.807 93.015,98.807 93.582,99.374 95.075,99.374 95.826,100.125 97.982,100.125 98.957,101.1 114.107,101.1 v2(118.086,97.121)
IO22: J5.4 MD1.36 | length 58.5
  Top Layer w0.152: MD1.36 v2@121.896,97.096 ; v2@121.896,97.121 v2@121.896,97.096 ; v2(121.9,97.125) 121.9,97.1 v2@121.896,97.096
  Bottom Layer w0.152: J5.4 71.12,96.596 73.838,99.314 75.209,99.314 77.764,101.868 97.532,101.868 98.438,102.775 116.25,102.775 v2(121.9,97.125)
IO23: J5.3 MD1.37 R6.2 | length 62.4
  Top Layer w0.152: MD1.37 v2@123.166,97.121 ; v2@123.166,97.141 v2(123.175,97.15)
  Bottom Layer w0.152: J5.3 68.809,95.377 73.279,99.847 74.905,99.847 75.402,100.345 75.402,101.002 R6.2 75.6,101.217 75.798,101.415 76.09,101.415 77.225,102.55 97.475,102.55 98.208,103.283 117.042,103.283 v2(123.175,97.15)
IO25: J4.10 MD1.10 | length 31.8
  Top Layer w0.152: v2(113,111.55) 113.006,111.556 MD1.10
  Bottom Layer w0.152: J4.10 86.609,112.908 86.609,112.266 87.15,111.725 89.05,111.725 89.85,110.925 89.85,109.75 90.139,109.461 90.139,109.457 90.362,109.234 90.366,109.234 90.425,109.175 109.825,109.175 111.594,110.944 112.394,110.944 v2(113,111.55)
IO26: J4.11 MD1.11 | length 26.5
  Top Layer w0.152: MD1.11 111.736,111.564 v2(111.75,111.55)
  Bottom Layer w0.152: J4.11 90.682,111.375 94.575,111.375 95.563,110.387 100.513,110.387 101.217,109.683 109.615,109.683 111.444,111.512 111.712,111.512 v2(111.75,111.55)
IO27: J4.12 MD1.12 | length 22.3
  Top Layer w0.152: MD1.12 v2(110.466,111.559) v2@110.475,111.55
  Bottom Layer w0.152: J4.12 92.606,111.991 94.759,111.991 95.85,110.9 100.975,110.9 101.684,110.191 109.098,110.191 v2(110.466,111.559)
IO32: J4.8 MD1.8 | length 40.3
  Top Layer w0.152: MD1.8 115.546,111.529 v2(115.55,111.525)
  Bottom Layer w0.152: J4.8 81.636,113.157 81.988,112.806 82.069,112.806 84.4,110.475 88.125,110.475 88.7,109.9 88.7,109.318 89.86,108.158 94.985,108.158 95.824,107.319 102.969,107.319 103.808,108.158 110.408,108.158 112.178,109.928 113.953,109.928 v2(115.55,111.525)
IO33: J4.9 MD1.9 | length 35.9
  Top Layer w0.152: v2(114.275,111.525) 114.276,111.526 MD1.9
  Bottom Layer w0.152: J4.9 84.039,112.938 84.039,112.236 85.242,111.033 88.617,111.033 89.325,110.325 89.325,109.425 90.084,108.666 110.166,108.666 111.936,110.436 113.186,110.436 v2(114.275,111.525)
IO34: J4.6 MD1.6 | length 48.4
  Top Layer w0.152: MD1.6 118.086,111.539 v2(118.1,111.525)
  Bottom Layer w0.152: J4.6 78.332,111.025 81.675,111.025 83.567,109.133 85.642,109.133 87.723,107.052 93.848,107.052 94.597,106.303 103.853,106.303 104.625,107.075 111.025,107.075 112.862,108.912 115.487,108.912 v2(118.1,111.525)
IO35: J4.7 MD1.7 | length 44.2
  Top Layer w0.152: MD1.7 116.816,111.534 v2(116.825,111.525)
  Bottom Layer w0.152: J4.7 80.197,111.7 81.975,111.7 83.842,109.833 87.467,109.833 89.7,107.6 94.075,107.6 94.864,106.811 103.386,106.811 104.225,107.65 110.75,107.65 112.52,109.42 114.72,109.42 v2(116.825,111.525)
IO36: J4.4 MD1.4 | length 56.8
  Top Layer w0.152: v2(120.625,111.525) 120.626,111.526 MD1.4
  Bottom Layer w0.152: J4.4 74.452,109.825 81.15,109.825 82.9,108.075 84.975,108.075 87.04,106.01 93.265,106.01 93.988,105.287 104.487,105.287 105.2,106 111.625,106 113.45,107.825 116.925,107.825 v2(120.625,111.525)
IO39: J4.5 MD1.5 | length 52.6
  Top Layer w0.152: v2@119.35,111.525 v2(119.356,111.531) MD1.5
  Bottom Layer w0.152: J4.5 76.367,110.45 81.532,110.45 83.399,108.583 85.367,108.583 87.406,106.544 93.556,106.544 94.305,105.795 104.22,105.795 104.933,106.508 111.283,106.508 113.175,108.4 116.225,108.4 v2(119.356,111.531)
NetC8_2: C8.2 J6.2 Q1.1 Q2.1 R6.1 R8.2 | length 19.8
  Bottom Layer w0.152: Q1.1@68.849,106.915 68.849,106.54 68.676,106.367 68.394,106.367 68.047,106.02 68.047,98.044 J6.2 67.903,97.9 69.096,97.9 70.551,99.354 70.551,99.395 70.683,99.527 70.724,99.527 70.724,100.365 70.643,100.446 70.973,100.446 72.702,102.175 R8.2 73.33,102.145 74.42,102.145 C8.2 74.468,102.133 75.582,102.133 R6.1
NetD2_2: D2.2 R7.1 | length 1.9
  Top Layer w0.152: D2.2 103.153,99.653 103.053,99.753 R7.1
NetDS1_1: DS1.1 R3.1 | length 1.8
  Top Layer w0.152: DS1.1 103.025,108.15 103.025,106.606 R3.1
NetQ3_1: Q3.1 R14.1 | length 1.1
  Top Layer w0.152: R14.1 90.312,101.238 90.312,100.173 Q3.1
NetQ4_1: Q4.1 R16.2 | length 2.2
  Top Layer w0.152: Q4.1 84.475,100.06 85.493,99.042 85.867,99.042 R16.2
NetR11_1: R11.1 U2.9 | length 1.8
  Top Layer w0.152: R11.1 86.2,108.3 86.449,108.051 86.449,107.789 86.852,107.386 U2.9
NetR12_2: R12.2 U2.11 | length 1.9
  Top Layer w0.152: R12.2 85.074,108.051 85.187,108.051 85.832,107.406 85.832,107.159 85.872,107.119 85.872,106.869
NetR13_1: R13.1 R15.2 U2.8 | length 4.8
  Top Layer w0.152: U2.8 90.094,106.794 90.425,107.125 90.425,107.648 R15.2 R13.1
RTS: Q3.2 R16.1 U2.24 | length 6.7
  Top Layer w0.152: U2.24 85.352,100.273 85.7,99.925 86.825,99.925 87.025,99.725 87.025,99.25 R16.1 87.225,99.05 88.225,99.05 88.575,99.4 88.575,100.01 Q3.2
RXD: R9.2 U2.25 | length 13.7
  Top Layer w0.152: R9.2 75.286,97.557 v1@75.286,98.425 ; U2.25 85.852,100.829 85.975,100.706 v1(85.975,100.625)
  Bottom Layer w0.152: v1@75.286,98.425 75.286,98.486 77.45,100.65 85.95,100.65 v1(85.975,100.625)
  other v1: 75.286,98.349
RXD0: J5.6 MD1.34 R10.1 | length 51.7
  Top Layer w0.152: J5.6 76.173,95.404 76.173,97.098 76.6,97.525 R10.1 ; v2@119.35,97.075 v2@119.356,97.069 ; MD1.34 v2@119.356,97.069 ; v2(119.356,97.121) v2@119.356,97.069
  Bottom Layer w0.152: J5.6 76.277,95.377 78.075,97.175 83.507,97.175 85.148,98.816 91.104,98.816 91.603,99.315 92.804,99.315 93.371,99.882 94.625,99.882 95.546,100.803 97.903,100.803 98.825,101.725 114.752,101.725 v2(119.356,97.121)
TXD: R10.2 U2.26 | length 13.7
  Top Layer w0.152: R10.2 77.487,97.533 77.487,98.34 v1(77.495,98.349) ; U2.26 86.352,101.267 86.913,100.707 87.118,100.707 v1(87.175,100.65)
  Bottom Layer w0.152: v1(77.495,98.349) 77.495,99.095 78.325,99.925 86.4,99.925 87.125,100.65 v1(87.175,100.65)
TXD0: J5.5 MD1.35 R9.1 | length 56.5
  Top Layer w0.152: J5.5 73.875,95.592 73.875,97.004 R9.1 ; v2(120.625,97.1) v2@120.626,97.099 ; MD1.35 v2@120.626,97.099 ; v2@120.626,97.121 v2@120.626,97.099
  Bottom Layer w0.152: J5.5 73.863,95.58 73.863,96.413 75.175,97.725 83.3,97.725 84.899,99.324 90.894,99.324 91.393,99.823 92.594,99.823 93.161,100.39 94.415,100.39 95.336,101.311 95.412,101.311 95.425,101.325 97.707,101.325 98.615,102.233 98.683,102.233 98.7,102.25 115.475,102.25 v2(120.625,97.1)
USB_D_N: D1.3 J1.2 Q1.3 U2.5 | length 26.6
  Top Layer w0.152: J1.2 D1.3@68.4,104.917 ; D1.3 68.588,104.925 68.961,104.552 v2@68.961,104.14 ; U2.5 88.271,104.913 88.913,104.913 89.182,105.182 89.432,105.182 v3(89.475,105.225)
  Bottom Layer w0.152: v2@68.961,104.14 69.624,104.14 69.649,104.115 69.799,104.115 70.307,103.607 72.549,103.607 73.89,104.947 89.231,104.947 89.475,105.191 v3(89.475,105.225) ; Q1.3@69.649,104.188 69.799,104.338 Q1.3@69.799,104.515
  other v2: 68.986,104.14
USB_D_P: D1.4 J1.3 Q2.3 U2.4 | length 27.1
  Top Layer w0.152: J1.3 67.025,104.267 67.777,103.515 67.777,103.398 68.15,103.025 68.613,103.025 68.986,102.652 v2(68.986,102.21) ; U2.4 88.58,104.397 89.497,104.397 v3(89.5,104.4)
  Bottom Layer w0.152: v2(68.986,102.21) 69.641,102.21 Q2.3 69.774,102.596 Q2.3@69.55,102.819 ; Q2.3@69.586,102.784 69.743,102.941 70.048,102.941 70.357,103.25 72.697,103.25 74.037,104.591 89.262,104.591 89.453,104.4 v3(89.5,104.4)
VBUS: C4.1 J3.2 R13.2 U1.3
pads on no net: J1.4 MD1.17 MD1.18 MD1.19 MD1.20 MD1.21 MD1.22 MD1.32 U2.1 U2.2 U2.10 U2.12 U2.13 U2.14 U2.15 U2.16 U2.17 U2.18 U2.19 U2.20 U2.21 U2.22 U2.23 U2.27

## Polygon pours and split planes (outlines as drawn)
GND on Top Layer "GND_L01_P017" (solid, pour order 17): 98.175,105.775 99.45,105.775 99.45,105.975 99.65,106.175 100.55,106.175 100.55,107.525 100.7,107.675 101.4,107.675 101.4,108.875 100.2,108.875 100.2,108.45 100.05,108.3 98.275,108.3 98.175,108.2
GND on Top Layer "GND_L01_P004" (solid, pour order 4): 114.859,107.62 114.859,103.911 118.567,103.911 118.567,107.62
+3V3 on Top Layer "+3V3_L01_P005" (solid, pour order 5): 95.9,107.05 95.9,101.625 95.75,101.475 94.75,100.475 94.75,99.175 98.275,99.175 98.275,100.475 97.15,101.6 97.15,107.05
GND on Top Layer "GND_L01_P006" (solid, pour order 6): 98.175,105.775 99.45,105.775 99.45,108.2 99.35,108.3 98.275,108.3 98.175,108.2
VBUS on Top Layer "VBUS_L01_P010" (solid, pour order 10): 94.875,105.775 94.875,108.325 93.525,108.325 92.925,108.925 92.925,110.475 92.625,110.775 92.075,110.775 91.8,110.5 91.8,108.325 92.05,108.075 92.05,107.4 93.225,107.4 93.6,107.025 93.6,105.775